# EAGLE board Lighting IC test (EAGLE 9.2.2)
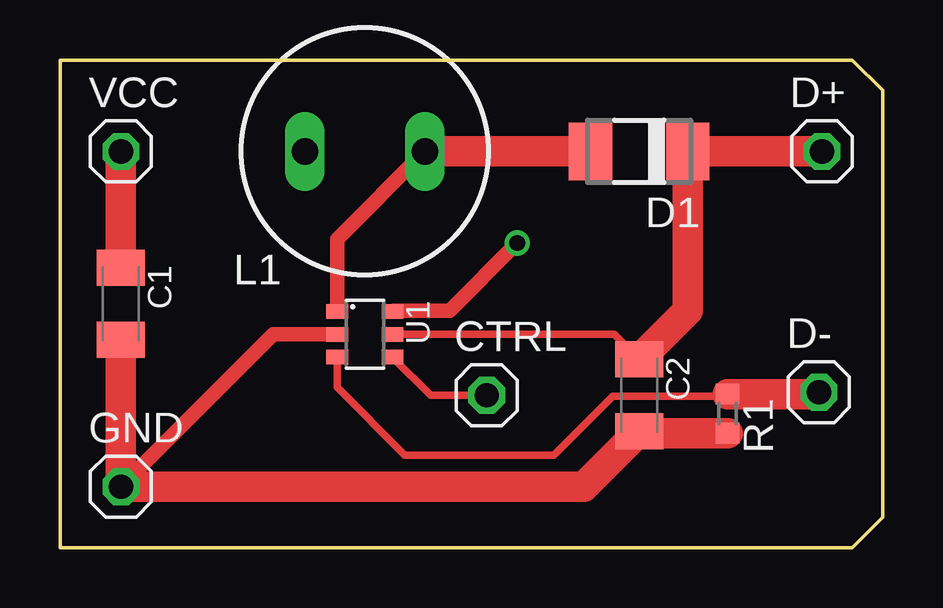
[diagram p0: board, top side]
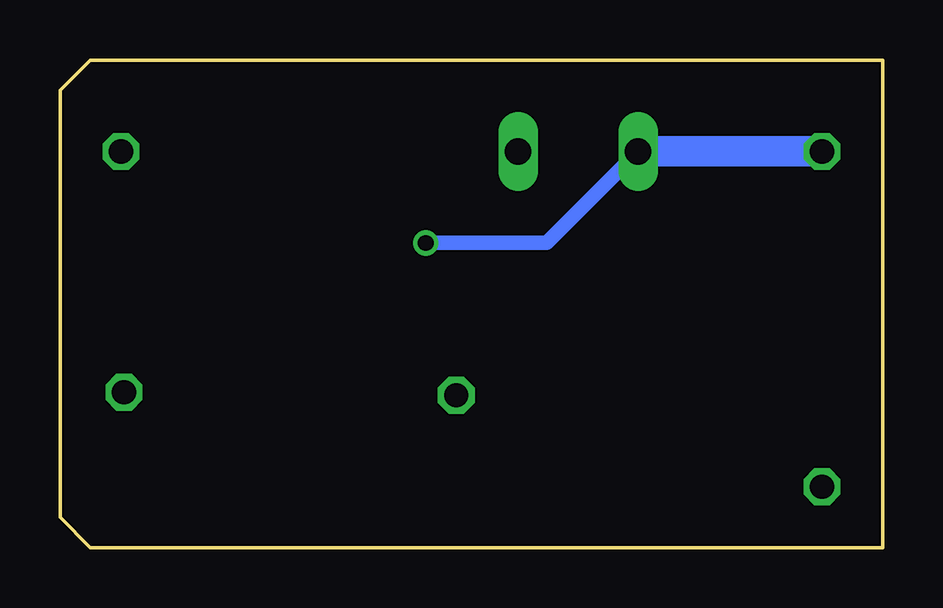
[diagram p1: board, bottom side, seen from below]

Size 34.29 x 20.32 mm. Coordinates in mm from the lower left corner, seen from the top.
Outline: 0,20.32 0,0 33.02,0 34.29,1.27 34.29,19.05 33.02,20.32 0,20.32
Copper layers (1*16): Top 0.035mm / dielectric 1.5mm / Bottom 0.035mm
Design rules "default": minimum track width 6mil, minimum drill 0.35mm, track to track 6mil, track to pad 6mil, pad to pad 6mil, via to via 6mil, smd to smd 6mil, copper to edge 40mil, drill to drill 6mil, minimum pad ring 10mil, minimum via ring 8mil, stop-mask expansion 4mil, vias tented up to drill 0mil, thermal gap 10mil
Net classes: 0 default: width 0.305 mm, clearance 0.305 mm

## Footprints (pad centres in the part's own frame; a part is rotated, then mirrored left to right if it is on the bottom)
C1206K = smd 1.5 x 2: 1 -1.5,0; 2 1.5,0
1X01 = drill 1.016 octagon: 1 0,0
DO-214AC = smd 1.8 x 2.4: A 2.025,0; C -2.025,0
SD12K100 = drill 1.1 long: 1 -2.5,0; 2 2.5,0
R0603 = smd 0.87 x 0.98: 1 -0.815,0; 2 0.815,0
SOT23-6 = smd 0.6 x 0.9: 1 -0.95,-1.15; 2 0,-1.15; 3 0.95,-1.15; 4 0.95,1.15; 5 0,1.15; 6 -0.95,1.15

## Placement (x,y rotation side)
C1  [C1206K]  2.54,10.16 270 top
C2  [C1206K]  24.13,6.35 270 top
CTRL  [1X01]  17.78,6.35 0 top
D1  [DO-214AC]  24.13,16.51 180 top
D+  [1X01]  31.75,16.51 0 top
D-  [1X01]  31.62,6.48 0 top
GND  [1X01]  2.54,2.54 0 top
L1  [SD12K100]  12.7,16.51 180 top
R1  [R0603]  27.81,5.59 270 top
U1  [SOT23-6]  12.7,8.89 270 top
VCC  [1X01]  2.54,16.51 0 top

## Library data of the parts
C1 C2 = rcl
CTRL D+ D- GND VCC = pinhead
D1 = diode
L1 = inductor-neosid
R1 = smd-ipc
U1 = ref-packages-longpad

## Nets
CONTROL: CTRL.1 U1.4
FEEDBACK: D-.1 R1.1 U1.3
GND: C1.2 C2.2 GND.1 R1.2 U1.2
SWITCH: D1.A L1.1 U1.1
VCC: C1.1 L1.2 U1.6 VCC.1
VOUT: C2.1 D1.C D+.1 U1.5

## Tracks (layer width: path | path; a pad name or v marks a point on that pad's centre or on a via)
CONTROL
  Top 0.305: U1.4 15.44,6.35 CTRL.1
FEEDBACK
  Top 0.305: R1.1 27.72,6.31 23.02,6.31 20.57,3.86 14.37,3.86 11.55,6.68 U1.3
  Top 1.27: R1.1 31.55,6.4 D-.1
GND
  Top 0.61: U1.2 8.89,8.89 GND.1
  Top 1.27: R1.2 24.21,4.77 C2.2 21.82,2.54 GND.1 C1.2
SWITCH
  Top 0.61: U1.1 11.55,12.86 L1.1
  Top 1.27: L1.1 D1.A
VCC  (via drill 0.65)
  Top 0.61: v19.05,12.7 16.23,9.88 13.88,9.88 U1.6
  Top 1.27: VCC.1 C1.1
  Bottom 0.61: L1.2 14.01,12.7 v19.05,12.7
  Bottom 1.27: VCC.1 L1.2
VOUT
  Top 0.305: C2.1 23.09,8.89 U1.5
  Top 1.27: D+.1 D1.C 26.16,9.88 C2.1